# Altium PCB Lumos_Probe.PcbDoc
Units mm, origin at the board's own origin, x right, y up, seen from the top; angles counter-clockwise.
Board outline 11.94 x 12.32 mm, 4 copper layers (Sensors, Ground, Power, Probe connector), stack 0.98 mm thick; 9 components, 13 nets, 60 pads, 14 vias.
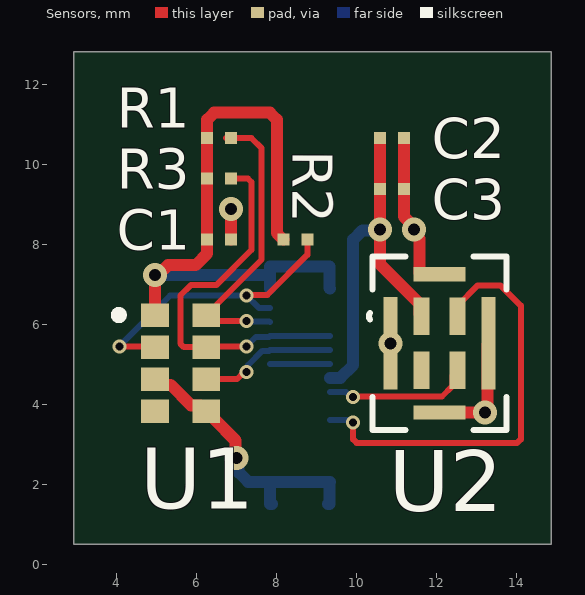
[diagram p0: Sensors view]
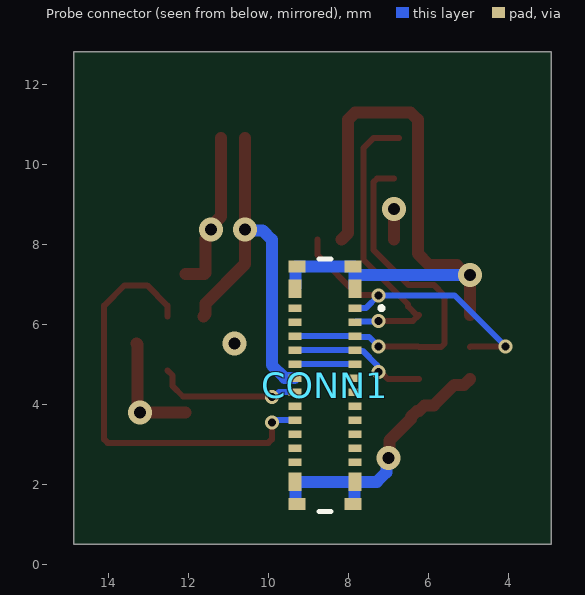
[diagram p1: Probe connector view, seen from below]
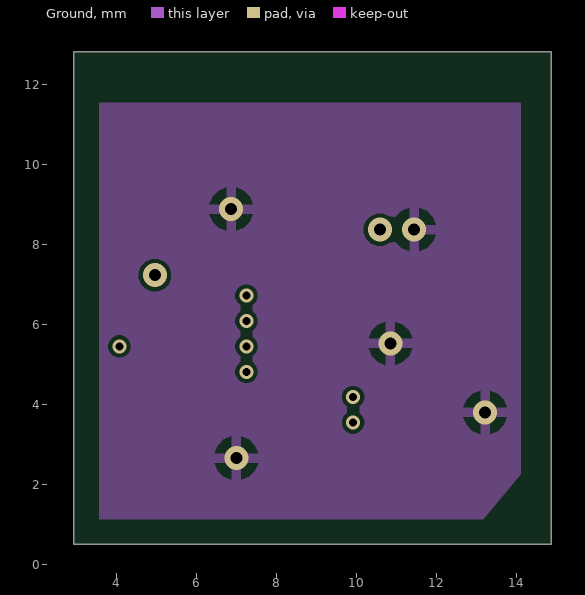
[diagram p2: Ground]
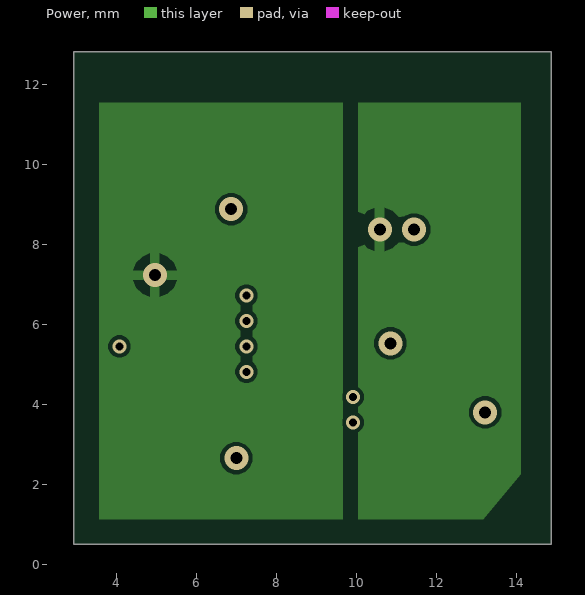
[diagram p3: Power]
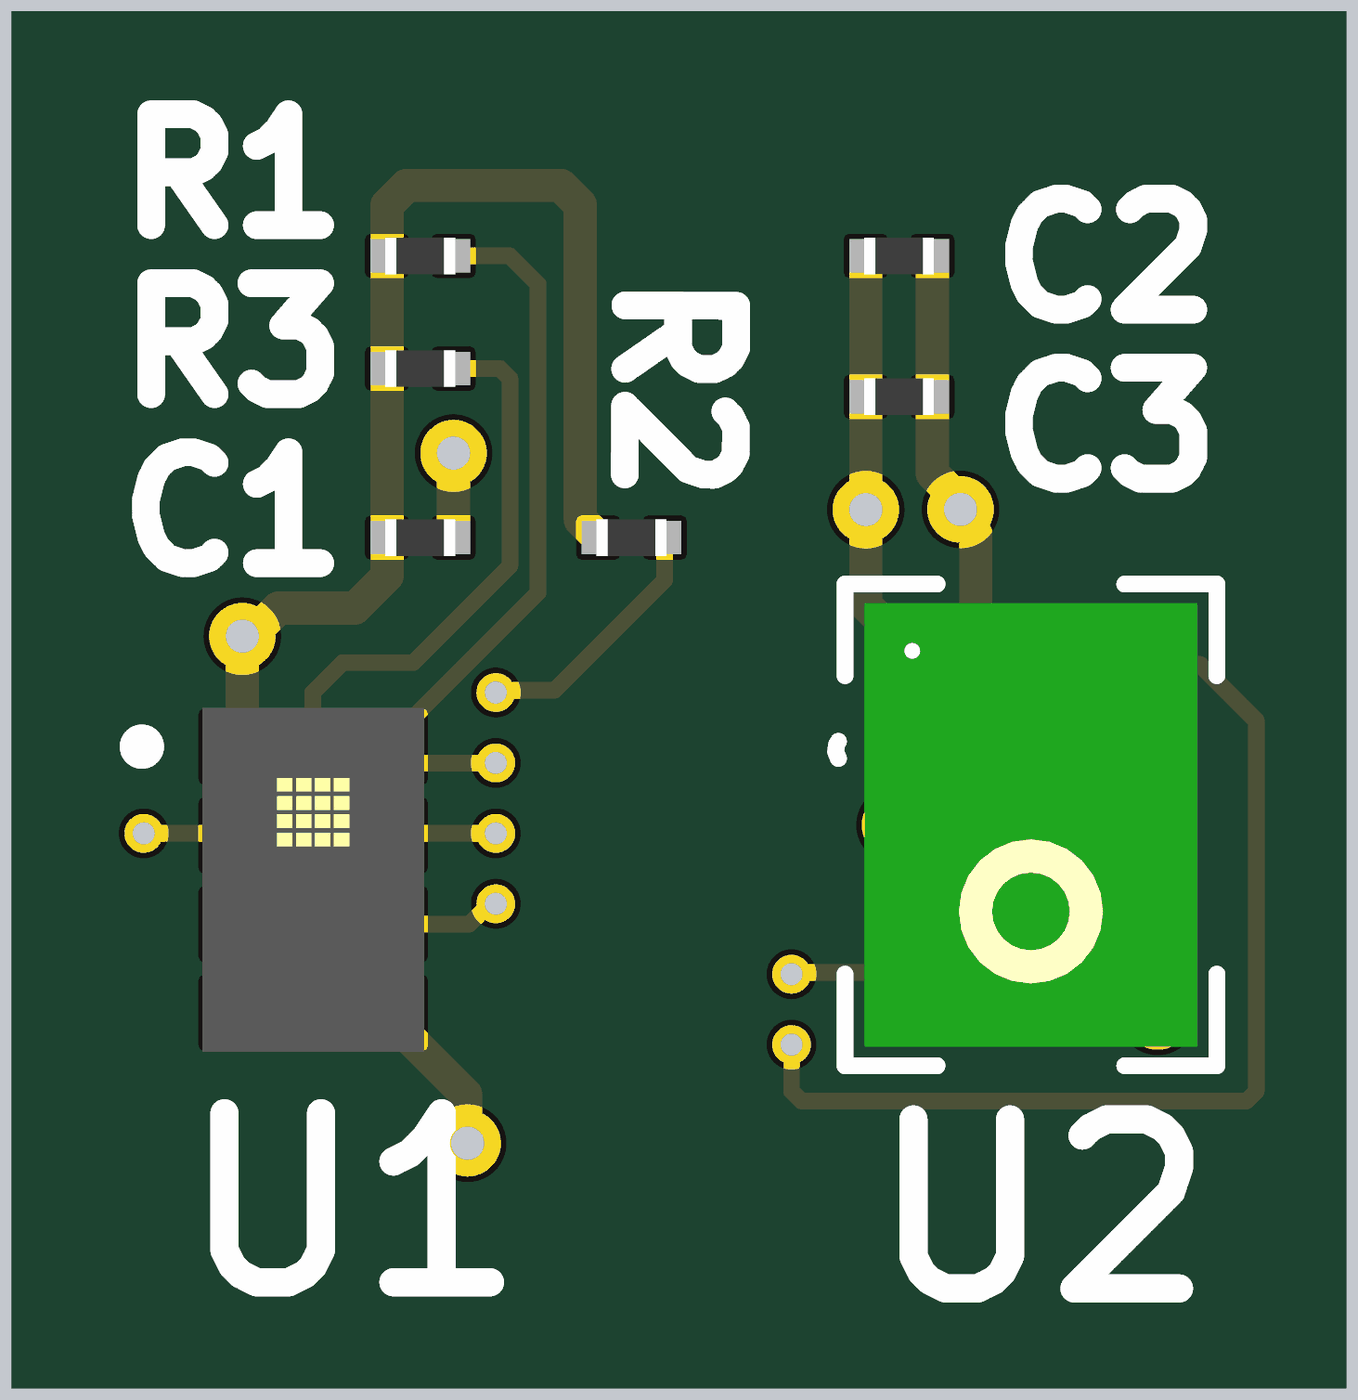
[diagram p4: 3D render of the assembled board from above, using the file's embedded part models]

## Layer stack, top to bottom
Top Solder: solder mask 0.0102, Solder Resist, Dk 3.5
Sensors: signal copper 0.0356
Dielectric 1: prepreg 0.2, PP-006, Dk 4.1
Ground: signal copper 0.0175
Dielectric 2: dielectric 0.4736, FR-4, Dk 4.8
Power: signal copper 0.0175
Dielectric 3: prepreg 0.2, PP-006, Dk 4.1
Probe connector: signal copper 0.0356
Bottom Solder: solder mask 0.0102, Solder Resist, Dk 3.5

## Board outline
2.921,0.508 2.921,12.827 14.859,12.827 14.859,0.508

## Design rules (kind name [scope] priority, off if disabled: settings)
Clearance [All] p1: gap=0.1 ignorepadtopadclearanceinfootprint=FALSE
HoleSize [All] p1: absolutevalues=TRUE maxlimit=2.54 minlimit=0.2 maxpercent=80.000 minpercent=20.000
MinimumSolderMaskSliver [All] p1: minsoldermaskwidth=0.08
PolygonConnect [All] p1: connectstyle=Relief reliefconductorwidth=0.25 reliefentries=4 polygonreliefangle="90 Angle" airgapwidth=0.25
RoutingVias RoutingVias_1 [(InNet('1V8') OR InNet('3V3') OR InNet('GND'))] p1: holewidth=0.3 width=0.6 viastyle="Through Hole" minholewidth=0.3 minwidth=0.6 maxholewidth=0.35 maxwidth=0.65
RoutingVias [All] p2: holewidth=0.15 width=0.25 viastyle="Through Hole" minholewidth=0.15 minwidth=0.25 maxholewidth=0.2 maxwidth=0.35
SolderMaskExpansion [All] p1: expansion=0.05 istentingtop=FALSE
SupplyNets "Schematic Supply Nets" [InNet('GND')] p1: voltage=0.000
Width Width_Power [InNet('1V8') OR InNet('3V3') OR InNet('GND')] p1: maxlimit=1 minlimit=0.15 preferedwidth=0.3
Width [All] p2: maxlimit=1 minlimit=0.15 preferedwidth=0.15
28 further rules are at their usual default settings.

## Components (designator, comment, footprint, x,y, rotation, side; value= is the part's Value field where it differs from the comment)
C1 "0402YC104JAT4A" Chip2PinSM127P600-8N 6.558,8.128 r0 top value=100nF
C2 "0402YD105KAT4A" Chip2PinSM127P600-8N 10.876,10.668 r0 top value=1µF
C3 "0402YC104JAT4A" Chip2PinSM127P600-8N 10.876,9.398 r0 top value=100nF
CONN1 "BM29B0.6-24DS/2-0.35V(51)" BM29B0.6-24DS_2-0.35V(51)-Footprint-1 8.574,4.616 r90 bottom locked
R1 "CR0201-JW-472GLF" Chip2PinSM127P600-8N 6.558,10.668 r0 top value=4.7k
R2 "CR0201-JW-472GLF" Chip2PinSM127P600-8N 8.463,8.128 r0 top value=4.7k
R3 "CR0201-JW-472GLF" Chip2PinSM127P600-8N 6.558,9.652 r0 top value=4.7k
U1 "AS7341-DLGT" PSON80P310X200X110-8N 5.592,5.043 r0 top locked
U2 "IMP34DT05" HCLGA_3X4X1_STM 12.065,5.537 r0 top

## Footprints (in the part's own frame and the unit in brackets; to place one, negate y for a bottom-side part, rotate by r counter-clockwise, add the part's x,y. Pads: shape width x height; smd on the part's side, far side on the other; paste and mask are expansions set on the pad)
BM29B0.6-24DS_2-0.35V(51)-Footprint-1 [mm]
  rect 0.18x0.32 smd mask+0.038: 1(1.798,-0.75) 2(1.798,0.75) 3(1.448,-0.75) 4(1.448,0.75) 5(1.098,-0.75) 6(1.098,0.75) 7(0.748,-0.75) 8(0.748,0.75) 9(0.398,-0.75) 10(0.398,0.75) 11(0.048,-0.75) 12(0.048,0.75) 13(-0.302,-0.75) 14(-0.302,0.75) 15(-0.652,-0.75) 16(-0.652,0.75) 17(-1.002,-0.75) 18(-1.002,0.75) 19(-1.352,-0.75) 20(-1.352,0.75) 21(-1.702,-0.75) 22(-1.702,0.75) 23(-2.052,-0.75) 24(-2.052,0.75)
  rect 0.46x0.32 smd mask+0.038: P1_1(2.288,-0.75) P1_2(2.288,0.75) P2_2(-2.542,0.75)
  rect 0.3x0.42 smd mask+0.051: P1_3(2.838,-0.7) P1_4(2.838,0.7) P2_3(-3.092,-0.7) P2_4(-3.092,0.7)
  rect 0.46x0.32 smd mask+0.05: P2_1(-2.542,-0.75)
  silkscreen extent -3.28,-1.46 3.03,0.15, body extent -3.28,-0.75 3.03,0.75, height 0.57
Chip2PinSM127P600-8N [mm]
  rect 0.3x0.3 smd: 1(-0.3,0) 2(0.3,0)
  body extent -0.32,-0.17 0.32,0.17, height 0.26
HCLGA_3X4X1_STM [mil]
  rect 16x37 smd paste-8 mask+2: 1(-17.75,26.62) 2(-17.75,-26.62) 3(17.75,-26.62) 4(17.75,26.62)
  rect 51x14 smd paste-7 mask+2: 5(0,68) 6(0,-68)
  rect 14x91 smd paste-45.5 mask+2: 7(-48.25,0) 8(48.25,0)
  silkscreen extent -69,-86 66,86, body extent -59,-79 59,79, height 43
PSON80P310X200X110-8N [mm]
  rect 0.69x0.59 smd: 1(-0.64,1.2) 2(-0.64,0.4) 3(-0.64,-0.4) 4(-0.64,-1.2) 5(0.64,-1.2) 6(0.64,-0.4) 7(0.64,0.4) 8(0.64,1.2)
  silkscreen extent -1.64,1.1 -1.44,1.3, body extent -1,-1.55 1,1.55, height 1.1

## Part data
C1 C3: library part CMP-00047-1, "Ceramic Capacitor, Multilayer, Ceramic, 16V, 5% +Tol, 5% -Tol, X7R, 15% TC, 0.1uF, Surface Mount, 0402", Capacitor Type=Ceramic, Case/Package=0402, Manufacturer="KYOCERA AVX", Max Operating Temperature=125°C, Min Operating Temperature=-55°C, Package Shape=Rectangular, Package Style=SMTMeter, Rated DC Voltage (URdc)=16V, Supplier Part Number 1=KGM05AR71C104JN, Temperature Characteristics Code=X7R, Tolerance  (fill in as +-)=5%, Component Type=Capacitors, Dielectric Material=Ceramic, Height=0.56mm, JESD-609 Code=e3, Length=1mm, Manufacturer Part Number=0402YC104JAT4A, Mounting Technology="Surface Mount", Multilayer=Yes, Packaging="Tape and Reel", Pins=2, Reach SVHC Compliant=Yes, RoHS Compliant=Yes, Supplier 1=Avnet, Terminal Finish=Nickel, Termination=Wraparound, Tolerance (fill in as +-)=5%, Width=0.5mm
C2: library part CMP-001-00107-6, "Ceramic Capacitor, Multilayer, Ceramic, 16V, 10% +Tol, 10% -Tol, X5R, 15% TC, 1uF, Surface Mount, 0402", Capacitor Type=Ceramic, Case/Package=0402, Manufacturer="KYOCERA AVX", Max Operating Temperature=85°C, Min Operating Temperature=-55°C, Supplier Part Number 1=KGM05AR51C105KN, Component Type=Capacitors, Manufacturer Part Number=0402YD105KAT4A, Mounting Technology="Surface Mount", Pins=2, RoHS Compliant=Yes, Supplier 1=Avnet
CONN1: library part CMP-002-00106-1, "Connector Receptacle 26 Pos (24+2) SMD", Manufacturer="HIROSE ELECTRIC", Supplier Part Number 1=26-BM29B0.6-24DS/2-0.35V(53)CT-ND, Component Type=Connectors, Manufacturer Part Number=BM29B0.6-24DS/2-0.35V(51), Supplier 1=DigiKey
R1 R2 R3: library part CMP-00117-1, "Fixed Resistor, Metal Glaze/thick Film, 0.05W, 4700ohm, 30V, 5% +/-Tol, 200ppm/Cel, Surface Mount, 0201", Case/Package=0201, Manufacturer=Bourns, Max Operating Temperature=125°C, Min Operating Temperature=-55°C, Package Height=0.23mm, Package Length=0.6mm, Package Shape=Rectangular, Package Style=SMTMeter, Package Width=0.3mm, Power=50mW, Rated Temperature=70°C, Resistor Type="FIXED RESISTOR", Supplier Part Number 1=118-CR0201-JW-472GLFCT-ND, Temperature Coefficient=200ppm/°C, Tolerance=5%, Working Voltage=25V, Component Type=Resistors, Construction=Chip, JESD-609 Code=e3, Manufacturer Part Number=CR0201-JW-472GLF, Mounting Technology="Surface Mount", Packaging="Tape and Reel", Pins=2, Reach SVHC Compliant=Yes, RoHS Compliant=Yes, Supplier 1=DigiKey, Technology="RUTHENIUM OXIDE", Terminal Finish=Nickel, Termination=Wraparound
U1: "Optical Sensor Ambient - IÂ²C 8-TFLGA", Package="TFLGA-8 ams", Supplier Part Number 1=4328201, Availability="In Stock", Check_prices=https://www.snapeda.com/parts/AS7341-DLGT/ams/view-part/?ref=eda, MF=ams, MP=AS7341-DLGT, Price=None, Purchase-URL=https://pricing.snapeda.com/search/part/AS7341-DLGT/?ref=eda, SnapEDA_Link=https://www.snapeda.com/parts/AS7341-DLGT/ams/view-part/?ref=snap, Supplier 1=Farnell
U2: "MEMS audio sensor omnidirectional digital microphone for industrial applications", Manufacturer_Name=STMicroelectronics, Supplier Part Number 1=2980886, Copyright="Copyright (C) 2025 Ultra Librarian. All rights reserved.", Manufacturer_Part_Number=IMP34DT05, RefDes=RefDes, Supplier 1=Farnell, Type=Type

## Via types
v1: diameter 0.35, hole 0.2, Sensors to Probe connector, 7 vias
v2: diameter 0.6, hole 0.3, Sensors to Probe connector, 7 vias

## Nets (pads, with @x,y where several pads share a name; then routed paths per layer and width w, separated by ;. In a path a pad name is that pad's centre, name@x,y a point inside that pad or via, vN(x,y) a via of type N, cw(c..) or ccw(c..) an arc to the next point about the centre after c; other vN are vias at no path point)
1V8: C1.1 CONN1.P1_1 CONN1.P1_2 CONN1.P1_3 CONN1.P1_4 R1.1 R2.1 R3.1 U1.1 | length 16.3
  Sensors w0.3: U1.1 v2(4.953,7.239) 5.025,7.239 5.279,7.493 5.969,7.493 6.258,7.782 C1.1 R3.1 R1.1 6.258,11.127 6.434,11.303 7.825,11.303 8.001,11.127 8.001,8.29 R2.1
  Probe connector w0.3: v2(4.953,7.239) 7.834,7.239 ; CONN1.P1_1 7.834,6.914 7.834,7.239 ; CONN1.P1_4 CONN1.P1_3 7.834,7.454 7.834,7.239 ; CONN1.P1_4@9.314,7.454 9.314,6.914 CONN1.P1_2
3V3: C2.1 C3.1 CONN1.12 U2.1 | length 9.5
  Sensors w0.3: C2.1 C3.1 v2(10.576,8.38) 10.576,7.518 11.561,6.533 11.561,6.267 U2.1
  Probe connector w0.3: CONN1.12@9.334,4.674 9.588,4.674 9.906,4.992 9.906,8.128 10.137,8.359 10.555,8.359 v2(10.576,8.38)
GND: C1.2 C2.2 C3.2 CONN1.P2_1 CONN1.P2_2 CONN1.P2_3 CONN1.P2_4 U1.3 U1.5 U2.5 U2.6 U2.7 U2.8 | length 14.8
  Sensors w0.3: U1.3 5.097,4.498 5.345,4.498 5.854,3.988 6.087,3.988 U1.5 6.282,3.843 6.427,3.698 6.427,3.648 6.966,3.109 6.966,2.686 v2(6.985,2.667) ; C1.2 v2(6.858,8.89) ; C2.2 11.176,8.708 11.43,8.454 11.43,8.301 11.567,8.164 11.567,7.292 11.595,7.264 U2.5 ; U2.6 v2(13.208,3.81) 13.263,3.865 13.263,5.509 U2.8
  Probe connector w0.3: v2(6.985,2.667) 7.042,2.61 7.042,2.313 7.282,2.074 CONN1.P2_1 ; CONN1.P2_1@7.834,2.064 7.834,1.524 CONN1.P2_3 ; CONN1.P2_1@7.834,2.074 CONN1.P2_2 9.314,2.064 9.314,1.524 CONN1.P2_4
  other v2: 10.839,5.537 11.43,8.382
I2C3_SCL_1V8: CONN1.1 R2.2 U1.2 | length 7.6
  Sensors w0.15: v1(4.064,5.461) 4.934,5.461 U1.2 ; v1(7.239,6.731) 7.258,6.75 7.766,6.75 8.763,7.747 R2.2
  Probe connector w0.15: v1(4.064,5.461) 5.334,6.731 v1(7.239,6.731) 7.556,6.414 CONN1.1
I2C3_SCL_3V3: CONN1.2
I2C3_SDA_1V8: CONN1.3 R1.2 U1.8 | length 7.4
  Sensors w0.15: R1.2@6.731,10.668 R1.2 7.366,10.668 7.62,10.414 7.62,7.631 6.502,6.513 6.502,6.463 6.282,6.243 U1.8 6.379,6.096 v1(7.239,6.096)
  Probe connector w0.15: v1(7.239,6.096) 7.256,6.079 7.809,6.079 CONN1.3
I2C3_SDA_3V3: CONN1.4
MCU_I/O_1: CONN1.5 CONN1.6 R3.2 U1.7 | length 9.6
  Sensors w0.15: R3.2 7.278,9.652 7.366,9.564 7.366,7.874 6.493,7.001 5.858,7.001 5.588,6.731 5.588,5.531 5.676,5.443 U1.7 6.25,5.461 v1(7.239,5.461)
  Probe connector w0.15: v1(7.239,5.461) 7.477,5.699 7.809,5.699 CONN1.5 CONN1.6
MCU_I/O_2: CONN1.7 CONN1.8 U1.6 | length 3.5
  Sensors w0.15: U1.6 7.002,4.643 7.185,4.826 v1(7.239,4.826)
  Probe connector w0.15: v1(7.239,4.826) 7.277,4.864 7.277,4.991 7.635,5.349 7.809,5.349 CONN1.7 CONN1.8
MCU_I/O_3: CONN1.9 CONN1.10 | length 1.5
  Probe connector w0.15: CONN1.9 CONN1.10
MCU_I/O_4: CONN1.16
MIC_CLK: CONN1.14 U2.3 | length 3.7
  Sensors w0.15: v1(9.906,4.191) 9.921,4.206 12.128,4.206 12.388,4.466 12.388,4.733 U2.3
  Probe connector w0.15: CONN1.14 9.729,4.314 9.852,4.191 v1(9.906,4.191)
MIC_DOUT: CONN1.18 U2.4 | length 10.9
  Sensors w0.15: v1(9.906,3.556) 9.906,3.136 9.994,3.048 14.009,3.048 14.097,3.136 14.097,6.477 13.589,6.985 13.021,6.985 12.516,6.48 U2.4
  Probe connector w0.15: CONN1.18 9.794,3.614 9.852,3.556 v1(9.906,3.556)
pads on no net: CONN1.11 CONN1.13 CONN1.15 CONN1.17 CONN1.19 CONN1.20 CONN1.21 CONN1.22 CONN1.23 CONN1.24 U1.4 U2.2

## Polygon pours and split planes (outlines as drawn)
1V8 on Power "1V8_L03_P001" (solid, pour order 1): 9.652,1.143 9.652,11.557 3.556,11.557 3.556,1.143
3V3 on Power "3V3_L03_P000" (solid, pour order 0): 14.097,2.258 13.164,1.143 10.033,1.143 10.033,11.557 14.097,11.557
GND on Ground "GND_L02_P002" (solid, pour order 2): 3.556,11.557 13.97,11.557 14.1,11.557 14.1,2.264 13.165,1.142 3.556,1.143

## Silkscreen, mask and mechanical layers (free items; w line width, h text height)
Board:
  the board outline again, w0.1